# Altium PCB DE-100224.PcbDoc
Units mil, origin at the board's own origin, x right, y up, seen from the top; angles counter-clockwise.
Board outline 3346.46 x 2952.76 mil, 2 copper layers (Top Layer, Bottom Layer); 89 components, 54 nets, 214 pads, 11 vias.
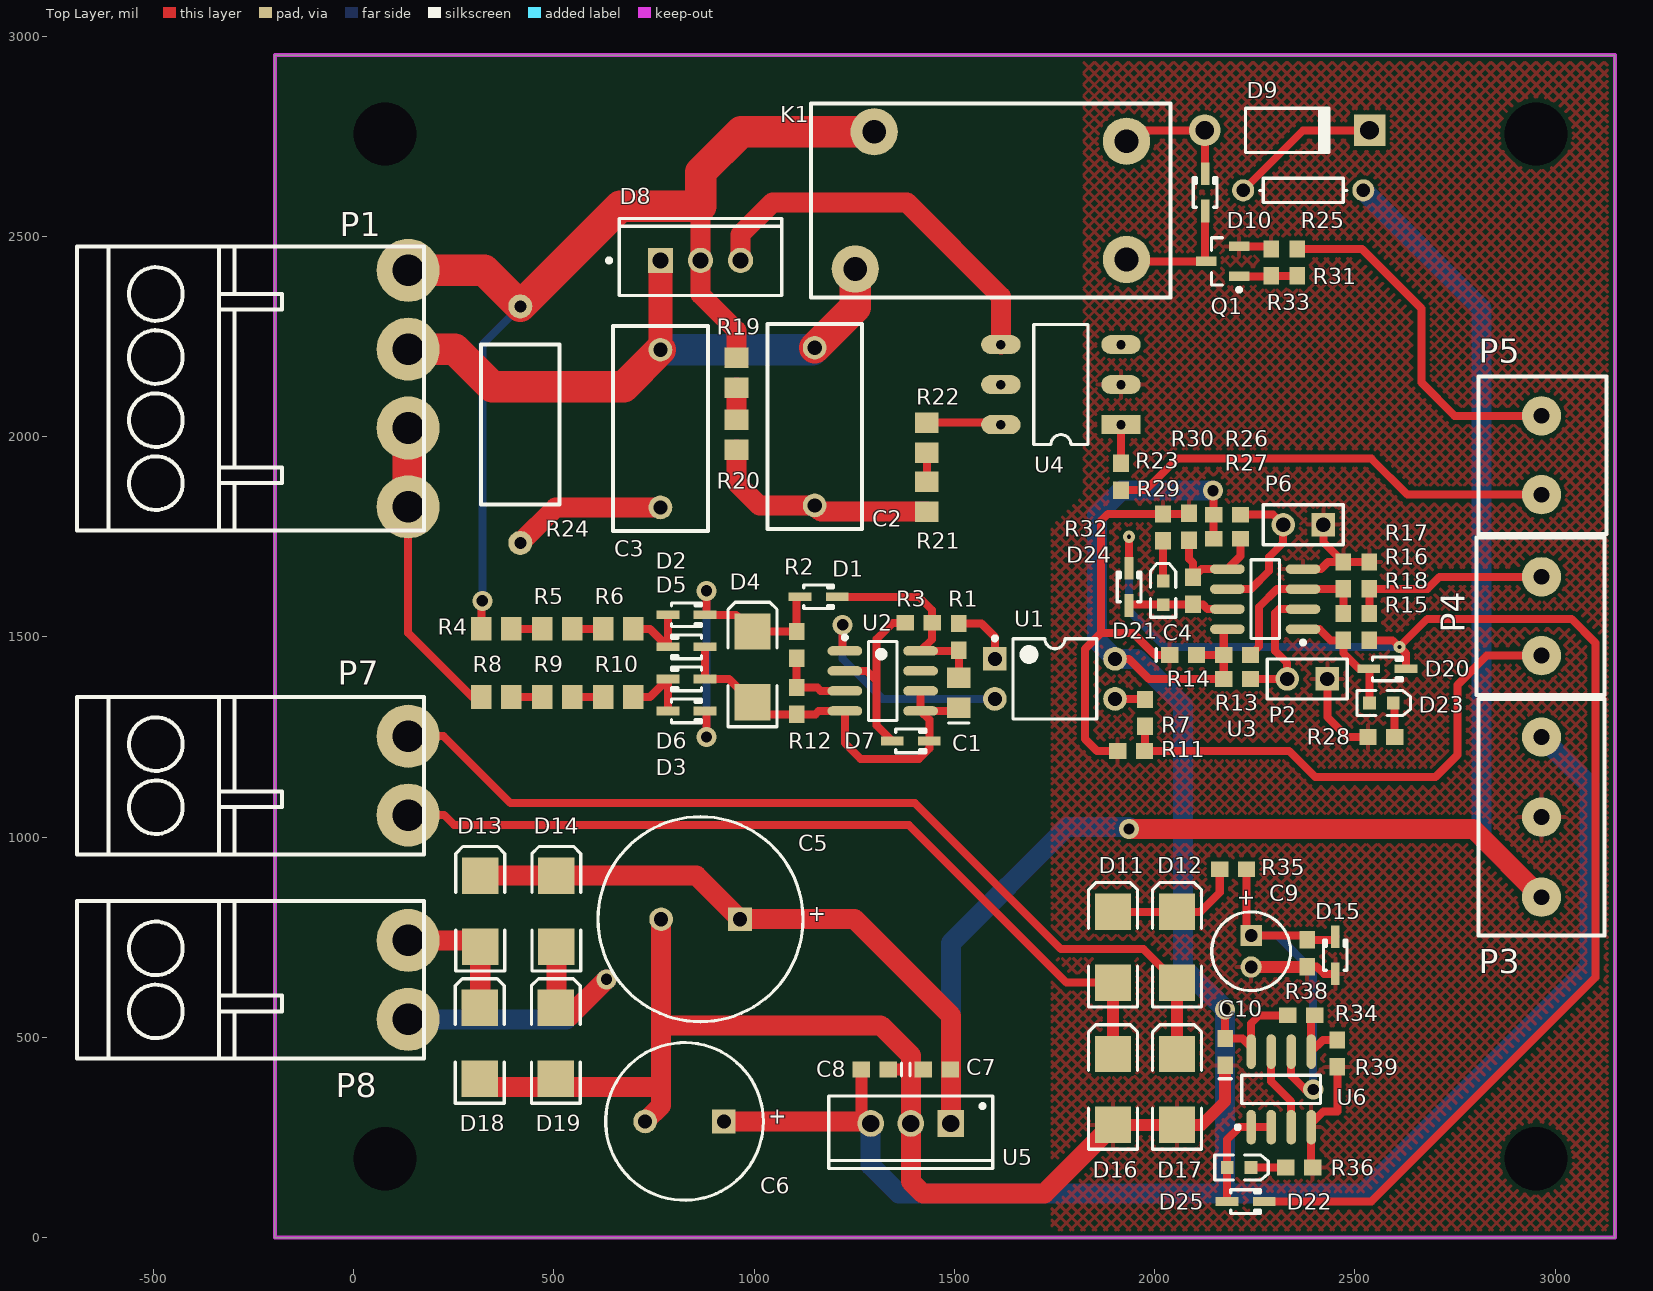
[diagram p0: Top Layer view]
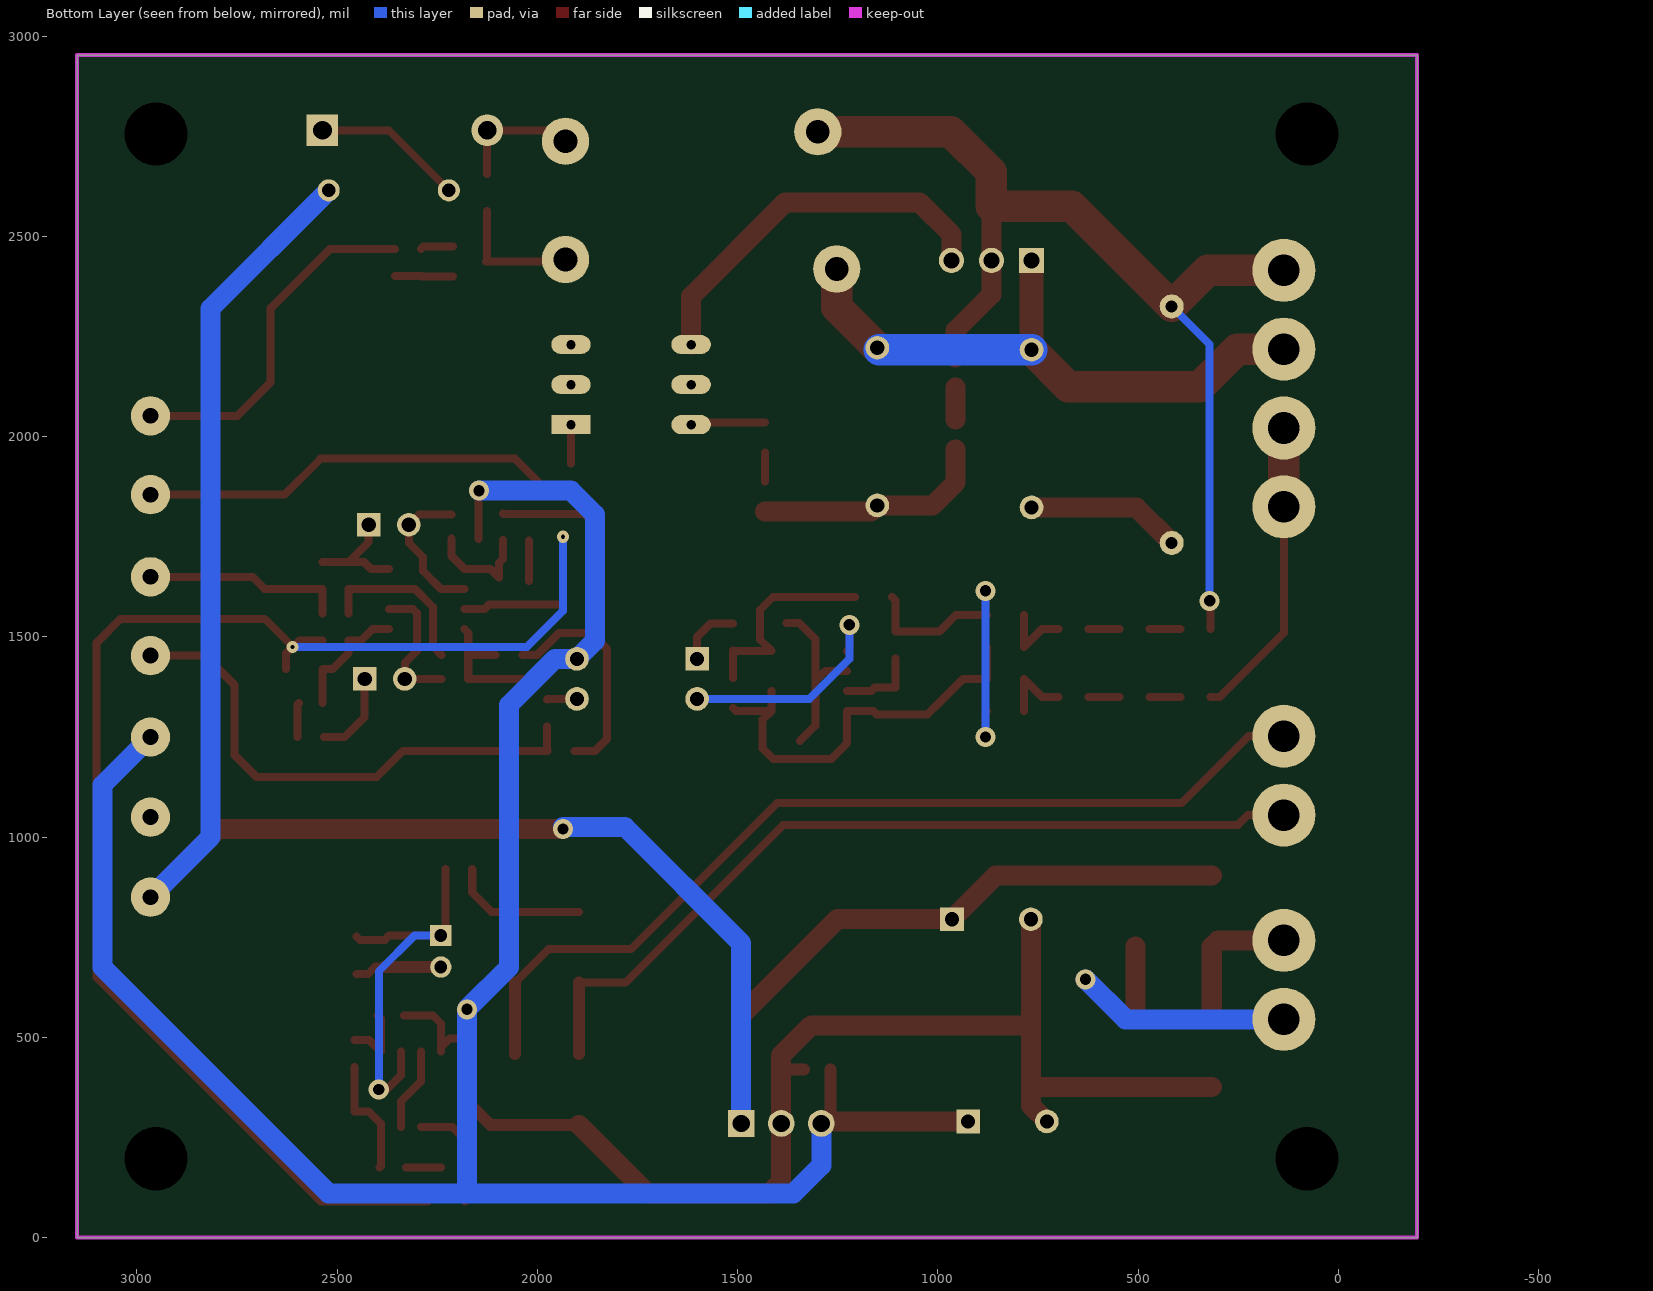
[diagram p1: Bottom Layer view, seen from below]

## Layer stack, top to bottom
Top Solder: solder mask 0.4, Solder Resist, Dk 3.5
Top Layer: signal copper 1.4
Dielectric 1: dielectric 12.6, FR-4, Dk 4.8
Bottom Layer: signal copper 1.4
Bottom Solder: solder mask 0.4, Solder Resist, Dk 3.5

## Board outline
-196.85,0 3149.61,0 3149.61,2952.76 -196.85,2952.76

## Design rules (kind name [scope] priority, off if disabled: settings)
Clearance [All] p1: gap=10 ignorepadtopadclearanceinfootprint=FALSE except(0: Arc-Hole Track-Hole SMDPad-Hole THPad-Hole Via-Hole Fill-Hole Poly-Hole Region-Hole Text-Hole)
Height [All] p1: minheight=0 maxheight=2000 prefheight=500
HoleSize [All] p1: absolutevalues=TRUE maxlimit=200 minlimit=1 maxpercent=80.000 minpercent=20.000
PolygonConnect [All] p1: connectstyle=Relief reliefconductorwidth=10 reliefentries=4 polygonreliefangle="90 Angle" airgapwidth=10
RoutingVias [All] p1: holewidth=28 width=50 viastyle="Through Hole" minholewidth=28 minwidth=50 maxholewidth=28 maxwidth=50
SolderMaskExpansion [All] p1: expansion=4
Width [All] p1: maxlimit=100 minlimit=10 preferedwidth=30
28 further rules are at their usual default settings.

## Components (designator, comment, footprint, x,y, rotation, side; value= is the part's Value field where it differs from the comment)
C1 "10uF" 0805 1511.3,1360 r90 top
C2 "47nF" "X2 CAP" 1151.3,2025 r270 top
C3 "47nF" "X2 CAP" 766.3,2020 r270 top
C4 "100nF" 0603 2071.3,1455 r0 top
C5 "4700uF" CAPPR5-13X25 866.3,795 r180 top
C6 "470uF" CAPPR5-10X16 826.3,290 r180 top
C7 "100nF" 0603 1456.3,420 r0 top
C8 "100nF" 0603 1301.3,420 r180 top
C9 "100uF" CAPPR2-5X11 2241.3,715 r270 top value=47uF
C10 "100nF" 0603 2176.3,463.46 r90 top
D1 "1N4148" SOD323 1161.3,1600 r0 top
D2 "1N4148" SOD323 831.3,1555 r0 top
D3 "1N4148" SOD323 831.3,1315 r0 top
D4 "ZD12V" SMB 996.3,1425 r90 top
D5 "1N4148" SOD323 831.3,1475 r180 top
D6 "1N4148" SOD323 831.3,1395 r180 top
D7 "1N4148" SOD323 1391.3,1240 r0 top
D8 "BTA16-600" ONSC-TO-220-3-221A-07 866.3,2440 r90 top
D9 "ZD8V2" DO-41 2331.3,2765 r0 top
D10 "1N4148" SOD323 2126.3,2610 r90 top
D11 "1N4001" SMB 1896.3,725 r90 top
D12 "1N4001" SMB 2056.3,725 r90 top
D13 "S3GB" SMB 316.3,815 r90 top
D14 "S3GB" SMB 506.3,815 r90 top
D15 "ZD3V3" SOD323 2451.3,705 r90 top
D16 "1N4001" SMB 1896.3,370 r90 top
D17 "1N4001" SMB 2056.3,370 r90 top
D18 "S3GB" SMB 315,485 r90 top
D19 "S3GB" SMB 505,485 r90 top
D20 "1N4148" SOD323 2581.3,1420 r0 top
D21 "1N4148" SOD323 1936.3,1625 r90 top
D22 "1N4148" SOD323 2227.56,90 r0 top
D23 "TRIAC_TEMP_ERROR" 1.6X0.8X0.8 2566.3,1335 r0 top
D24 "TRAFO_TEMP_ERROR" 1.6X0.8X0.8 2021.3,1610 r90 top
D25 "TRAFO_VOLTAGE_ERROR" 1.6X0.8X0.8 2211.3,175 r0 top
K1 "HF25F" HF25F 1591.3,2590 r180 top
P1 "KONEKTOR 4 PINA" "KONEKTOR 4 PINA" 136.3,2120 r0 top
P2 "NTC10K" HDR1X2 2431.3,1395 r180 top
P3 "" "TERMINAL BLOK 3" 2966.3,1050 r0 top
P4 "" "TERMINAL BLOK 2" 2966.3,1551.57 r180 top
P5 "" "TERMINAL BLOK 2" 2966.3,1953.43 r0 top
P6 "NTC10K" HDR1X2 2421.3,1780 r180 top
P7 "HEAT_TRAFO" "KONEKTOR 2 PINA" 136.3,1153.43 r0 top
P8 "PWR_TRAFO" "KONEKTOR 2 PINA" 136.3,643.43 r0 top
Q1 "MMBT2222A" SOT23_N 2169.96,2437.6 r180 top
R1 "1K" ERA-0603 1511.3,1500 r270 top
R2 "3K9" ERA-0603 1106.3,1480 r90 top
R3 "39K" ERA-0603 1411.3,1535 r0 top
R4 "18K" ERA-0805 356.3,1520 r0 top
R5 "18K" ERA-0805 508.8,1520 r0 top
R6 "18K" ERA-0805 661.3,1520 r0 top
R7 "1K2" ERA-0603 1976.3,1310 r90 top
R8 "18K" ERA-0805 356.3,1350 r0 top
R9 "18K" ERA-0805 508.8,1350 r0 top
R10 "18K" ERA-0805 661.3,1350 r0 top
R11 "2K2" ERA-0603 1941.3,1215 r0 top
R12 "39K" ERA-0603 1106.3,1340 r90 top
R13 "10K" ERA-0603 2206.3,1395 r180 top
R14 "10K" ERA-0603 2206.3,1455 r180 top
R15 "1K" ERA-0603 2536.3,1525 r270 top
R16 "2K2" ERA-0603 2536.3,1653.46 r270 top
R17 "NF" ERA-0603 2471.3,1653.46 r270 top
R18 "220K" ERA-0603 2471.3,1525 r90 top
R19 "220R" ERA-0805 956.3,2160 r270 top
R20 "220R" ERA-0805 956.3,2005 r270 top
R21 "220R" ERA-0805 1431.3,1850 r90 top
R22 "220R" ERA-0805 1431.3,1997.6 r90 top
R23 "180R" ERA-0603 1916.3,1900 r90 top
R24 "100R" 1W100R 416.3,2030 r90 top
R25 "Res1" AXIAL-0.3 2371.3,2615 r0 top value=47R
R26 "10K" ERA-0603 2181.3,1805 r180 top
R27 "10K" ERA-0603 2181.3,1745 r180 top
R28 "1K" ERA-0603 2566.3,1250 r0 top
R29 "1K" ERA-0603 2021.3,1773.46 r270 top
R30 "NF" ERA-0603 2086.3,1775 r270 top
R31 "1K" ERA-0603 2356.3,2435 r270 top
R32 "220K" ERA-0603 2096.3,1615 r90 top
R33 "100K" ERA-0603 2291.3,2435 r270 top
R34 "10K" ERA-0603 2366.3,555 r180 top
R35 "33K" ERA-0603 2196.3,920 r180 top
R36 "1K" ERA-0603 2361.3,175 r180 top
R38 "3K3" ERA-0603 2381.3,710 r90 top
R39 "NF" ERA-0603 2456.3,460 r90 top
U1 "PC817" DIP-4 1751.3,1395 r0 top
U2 "LM393MX" M08A_N 1321.3,1390 r0 top
U3 "LM358AD" SO8_N 2276.3,1594.19 r180 top
U4 "MOC3052" DIP6 1916.3,2030 r180 top
U5 "L78M05CV" TO220 1391.3,285 r180 top
U6 "LM358AD" SO8_N 2316.3,370 r90 top

## Footprints (in the part's own frame and the unit in brackets; to place one, negate y for a bottom-side part, rotate by r counter-clockwise, add the part's x,y. Pads: shape width x height; smd on the part's side, far side on the other; paste and mask are expansions set on the pad)
1.6X0.8X0.8 [mm] "SM LED; 2 Flat Leads"
  rect 0.8x0.8 smd: 1(-0.75,0) 2(0.75,0)
  silkscreen extent -1.55,-0.8 1.85,0.8
1W100R [mil] "1W 100R resistor"
  round 60 hole 30: 1(-295.28,0) 2(295.28,0)
  silkscreen extent -200,-98 200,98
0603 [mm] "Chip Capacitor; Body 1.6 x 0.8 mm (LxW typ)"
  rect 1.1x1 smd: 1(-0.85,0) 2(0.85,0)
  silkscreen extent -1.7,-0.4 -1.7,0.4
0805 [mm] "Chip Capacitor; Body 2.0 x 1.2 mm (LxW typ)"
  rect 1.3x1.5 smd: 1(-0.95,0) 2(0.95,0)
  silkscreen extent -1.9,-0.65 -1.9,0.65
AXIAL-0.3 [mm] "Axial Device, Thru-Hole; 2 Leads; 0.3 in Pin Spacing"
  round 1.4 hole 0.85: 1(-3.81,0) 2(3.81,0)
  silkscreen extent -2.77,-0.76 2.77,0.76
CAPPR2-5X11 [mm] "Capacitor, Electrolytic, Radial; Body 5 x 11 mm (Dia.xH typ); Pin Spacing 2 mm (typ)"
  rect 1.35x1.35 hole 0.8: 1(-1,0)
  round 1.35 hole 0.8: 2(1,0)
  silkscreen extent -2.5,-2.5 2.5,2.5
CAPPR5-10X16 [mm] "Capacitor, Electrolytic, Radial; Body 10 x 16 mm (Dia.xH typ); Pin Spacing 5 mm (typ)"
  rect 1.5x1.5 hole 0.9: 1(-2.5,0)
  round 1.5 hole 0.9: 2(2.5,0)
  silkscreen extent -5,-5 5,5
CAPPR5-13X25 [mm] "Capacitor, Electrolytic, Radial; Body 13 x 25 mm (Dia.xH typ); Pin Spacing 5 mm (typ)"
  rect 1.5x1.5 hole 0.9: 1(-2.5,0)
  round 1.5 hole 0.9: 2(2.5,0)
  silkscreen extent -6.5,-6.5 6.5,6.5
DIP6 [mm]
  rect 2.5x1.2 hole 0.6: 1(0,0)
  oval 2.5x1.2 hole 0.6: 2(0,-2.54) 3(0,-5.08) 4(7.62,-5.08) 5(7.62,-2.54) 6(7.62,0)
  silkscreen extent 2.08,-6.35 5.54,1.27, body extent 0.63,-6.48 6.99,1.27, height 1
DIP-4 [mm] "DIP; 4 Leads; Row Spacing 7.62 mm; Pitch 2.54 mm"
  rect 1.5x1.5 hole 0.9: 1(-3.81,1.27)
  round 1.5 hole 0.9: 2(-3.81,-1.27) 3(3.81,-1.27) 4(3.81,1.27)
  silkscreen extent -3.93,-2.55 2.65,2.69, body extent -3.15,-2.5 3.15,2.5, height 5.6
DO-41 [mm] "Diode, Axial; Body 5.2 x 2.7 mm (LxDia. max), Lead Dia. 0.86 mm (max)"
  round 2 hole 1.2: 1(-5.23,0)
  rect 2x2 hole 1.2: 2(5.23,0)
  silkscreen extent -2.65,-1.4 2.75,1.4
ERA-0603 [mm] "Chip Resistor; Body 1.6 x 0.8 mm (LxW typ)"
  rect 1.1x1 smd: 1(-0.85,0) 2(0.85,0)
ERA-0805 [mm] "Chip Resistor; Body 2 x 1.3 mm (LxW typ)"
  rect 1.3x1.5 smd: 1(-0.95,0) 2(0.95,0)
HDR1X2 [mm] "Connector; Header; 2 Position"
  rect 1.5x1.5 hole 0.9: 1(0,0)
  round 1.5 hole 0.9: 2(2.54,0)
  silkscreen extent -1.27,-1.27 3.81,1.27
HF25F [mm] "PCB relay 20A/250VAC 16A/30VDC"
  round 3 hole 1.5: 1(-8.6,3.75) 2(-8.6,-3.75) 3(8.6,4.35) 4(7.4,-4.35)
  silkscreen extent -11.4,-6.15 11.4,6.15, body extent -11.43,-6.1 11.43,6.1, height 25
"KONEKTOR 2 PINA" [mm] "Razdvojivi konektor 2 pina"
  round 4 hole 2: 1(0,2.5) 2(0,-2.5)
  silkscreen extent -21,-5 1,5, body extent -20.95,-5.08 1.02,5.08, height 10
"KONEKTOR 4 PINA" [mm] "Razdvojivi konektor 4 pina"
  round 4 hole 2: 1(0,7.5) 2(0,2.5) 3(0,-2.5) 4(0,-7.5)
  silkscreen extent -21,-9 1,9, body extent -20.95,-9.02 1.02,9.14, height 10
M08A_N [mm] "SOIC, 8-Leads, Body 4.9x3.9mm, Pitch 1.27mm, IPC Medium Density"
  oval 2.2x0.6 smd: 1(-2.4,1.905) 2(-2.4,0.635) 3(-2.4,-0.635) 4(-2.4,-1.905) 5(2.4,-1.905) 6(2.4,-0.635) 7(2.4,0.635) 8(2.4,1.905)
  silkscreen extent -2.52,-2.5 0.9,2.88, body extent -2,-2.5 2,2.5, height 1.75
ONSC-TO-220-3-221A-07 [mm] "FM, 3-Leads, Body 10.3x4.85mm, Pitch 2.54mm"
  rect 1.6x1.6 hole 1: 1(0,2.54)
  round 1.6 hole 1: 2(0,0) 3(0,-2.54)
  silkscreen extent -2.23,-5.15 2.67,5.92, body extent -2.21,-5.15 2.64,5.15, height 19.68
SMB [mm] "DO-214-AA/SMB; 2 C-Bend Leads; Body 5.3 x 3.6 mm, inc. leads (LxW)"
  rect 2.3x2.3 smd: 1(-2.25,0) 2(2.25,0)
  silkscreen extent -3.8,-1.55 4.1,1.55
SO8_N [mm] "SOIC, 8-Leads, Body 4.9x3.9mm, Pitch 1.27mm, IPC Medium Density"
  oval 2.2x0.6 smd: 1(-2.4,1.905) 2(-2.4,0.635) 3(-2.4,-0.635) 4(-2.4,-1.905) 5(2.4,-1.905) 6(2.4,-0.635) 7(2.4,0.635) 8(2.4,1.905)
  silkscreen extent -2.53,-2.5 0.9,2.88, body extent -1.95,-2.45 1.95,2.45, height 1.75
SOD323 [mm] "SOD-323/SC-76; 2 Leads; Body 1.7 x 1.3 mm, (LxW)"
  rect 1.45x0.55 smd: 1(1.175,0) 2(-1.175,0)
  silkscreen extent -0.95,-0.75 0.95,0.75
SOT23_N [mm] "SOT23, 3-Leads, Body 2.9x1.3mm, Pitch 0.95mm, Lead Span 2.3mm, IPC Medium Density"
  rect 1.3x0.6 smd: 1(-1.05,0.95) 2(-1.05,-0.95) 3(1.05,0)
  silkscreen extent -1.18,-1.5 0.7,1.92, body extent -0.7,-1.5 0.7,1.5, height 1.1
"TERMINAL BLOK 2" [mm] "Terminal blok 3,5mm"
  round 2.5 hole 1: 1(0,-2.5) 2(0,2.5)
  silkscreen extent -4,-5 4.13,5
"TERMINAL BLOK 3" [mm] "Terminal blok konektor 3 pina"
  round 2.5 hole 1: 1(0,5.08) 2(0,0) 3(0,-5.08)
  silkscreen extent -4,-7.5 4,7.5
TO220 [mm] "TO, Thru-Hole, Vertical, Heatsink Mounted; 3 In-Line Leads; Pitch 2.54 mm"
  rect 1.7x1.7 hole 1.1: 1(-2.54,0)
  round 1.7 hole 1.1: 2(0,0) 3(2.54,0)
  silkscreen extent -5.2,-1.75 5.2,2.85, body extent -5.25,-1.8 5.25,2.9, height 19.7
"X2 CAP" [mm] "X2 275VAC CAPACITOR"
  round 1.5 hole 0.9: 1(-5,0) 2(5,0)
  silkscreen extent -6.5,-3 6.5,3, body extent -6.35,-3.05 6.35,3.05, height 10

## Part data
C1: library part C0805, "Ceramic Chip Capacitor - Standard", PackageDocument=Mar-2001, Code_IPC=2012[0805], Code_JEITA=0805, ComponentLink1Description="Manufacturer Link", ComponentLink1URL=http://www.kemet.com/, ComponentLink2Description=Datasheet, ComponentLink2URL=http://www.kemet.com/kemet/web/homepage/kechome.nsf/vapubfilesname/F3102TA.pdf/$file/F3102TA.pdf, DatasheetDocument=Mar-2001, LatestRevisionDate=19-Mar-2004, LatestRevisionNote="Silkscreen size reduced.", Note="Footprint corresponds to dimensions for bulk cassette packaging. This case size has tightened tolerances.", PackageReference=0805, Published=17-Jul-2002, Publisher="Altium Limited"
C2 C3: library part "CAP X2", "X2 275VAC capaitor"
C4 C7 C8 C10: library part C0603, "Ceramic Chip Capacitor - Standard", PackageDocument=Mar-2001, Code_IPC="1608 [0603]", Code_JEITA=0603, ComponentLink1Description="Manufacturer Link", ComponentLink1URL=http://www.kemet.com/, ComponentLink2Description=Datasheet, ComponentLink2URL=http://www.kemet.com/kemet/web/homepage/kechome.nsf/vapubfilesname/F3102TA.pdf/$file/F3102TA.pdf, DatasheetDocument=Mar-2001, LatestRevisionDate=19-Mar-2004, LatestRevisionNote="Silkscreen size reduced.", Note="Footprint corresponds to dimensions for bulk cassette packaging. This case size has tightened tolerances.", PackageReference=0603, Published=17-Jul-2002, Publisher="Altium Limited"
C5: library part EKA00GG447C00, "Aluminum Electrolytic Capacitor, Radial Style with Long Leads: 4700uF, 10V", ComponentLink1Description="Manufacturer Link", ComponentLink1URL=http://www.vishay.com/, ComponentLink2Description=Datasheet, ComponentLink2URL=http://www.vishay.com/docs/25014/eka.pdf, DatasheetDocument=20-Feb-2001, DrillSize="Nominal, Rounded To The Nearest 0.1mm", Note="Refer to Manufacturer's Data Sheets for other lead formations", PackageReference=CAPPR5-13X25, Published=19-Mar-2004, Publisher="Altium Limited"
C6: library part EKA00DD347F00, "Aluminum Electrolytic Capacitor, Radial Style with Long Leads: 470uF, 35V", ComponentLink1Description="Manufacturer Link", ComponentLink1URL=http://www.vishay.com/, ComponentLink2Description=Datasheet, ComponentLink2URL=http://www.vishay.com/docs/25014/eka.pdf, DatasheetDocument=20-Feb-2001, DrillSize="Nominal, Rounded To The Nearest 0.1mm", Note="Refer to Manufacturer's Data Sheets for other lead formations", PackageReference=CAPPR5-10X16, Published=19-Mar-2004, Publisher="Altium Limited"
C9: library part EKA00AA247F00, "Aluminum Electrolytic Capacitor, Radial Style with Long Leads: 47uF, 35V", ComponentLink1Description="Manufacturer Link", ComponentLink1URL=http://www.vishay.com/, ComponentLink2Description=Datasheet, ComponentLink2URL=http://www.vishay.com/docs/25014/eka.pdf, DatasheetDocument=20-Feb-2001, DrillSize="Nominal, Rounded To The Nearest 0.1mm", Note="Refer to Manufacturer's Data Sheets for other lead formations", PackageReference=CAPPR2-5X11, Published=19-Mar-2004, Publisher="Altium Limited"
D1 D2 D3 D5 D6 D7 D10 D15 D20 D21 D22: library part 1PS76SB10, "Schottky Barrier Diode", ComponentLink1Description="Manufacturer Link", ComponentLink1URL=http://www.semiconductors.philips.com/, ComponentLink2Description=Datasheet, ComponentLink2URL=http://www.semiconductors.philips.com/acrobat/datasheets/1PS76SB10_2.pdf, DatasheetVersion=14-Oct-1996, LatestRevisionDate=19-Mar-2004, LatestRevisionNote="Silkscreen size reduced.", PackageDescription="SOD-323/SC-76; 2 Leads; Body 1.7 x 1.3 mm, (LxW)", PackageReference=SOD323, PackageVersion=May-1999, Published=17-Sep-2003, Publisher="Altium Limited"
D4: library part 10BQ100, "Schottky Rectifier", ComponentLink1Description="Manufacturer Link", ComponentLink1URL=http://www.irf.com/, ComponentLink2Description=Datasheet, ComponentLink2URL=http://www.irf.com/product-info/datasheets/data/10bq100.pdf, DatasheetVersion=PD-2.437A, LatestRevisionDate=17-Jul-2002, LatestRevisionNote="Re-released for DXP Platform.", PackageDescription="DO-214-AA/SMB; 2 C-Bend Leads; Body 5.3 x 3.6 mm, inc. leads (LxW)", PackageReference=SMB, Published=8-Jun-2000, Publisher="Altium Limited"
D8: library part BTA08-600BW3G, "Triacs, Silicon Bidirectional Thyristor, 3-Pin TO-220, Pb-Free, Tube", Manufacturer="On Semiconductor", Supplier Part Number 1=BTA08-600BW3G-ND, ComponentLink1Description="Manufacturer URL", ComponentLink1URL=http://www.onsemi.com/, ComponentLink2Description=Datasheet, ComponentLink2URL=http://www.onsemi.com/pub_link/Collateral/BTA08-600BW3-D.PDF, ComponentLink3Description="Package Specification", ComponentLink3URL=http://www.onsemi.com/pub_link/Collateral/221A-07.PDF, DatasheetVersion="Rev. 1", IGT Max (mA)=50, IT(RMS) Max (A)=8, ITSM Max (A)=90, Mounting Technology="Through Hole", PackageDescription="3-Pin Flange Mount, Vertical Straight Lead, Body 9.97 x 4.445 mm, Pitch 2.54 mm", PackageReference=TO-220-3-221A-07, PackageVersion="Rev. O, 07/2008", Packing=Tube, PartNumber=BTA08-600BW3G, RoHS=Pb-Free, Supplier 1=Digi-Key, Supplier 2=Newark, Supplier 3=Mouser, Supplier Part Number 2=13P2072, Supplier Part Number 3=863-BTA08-600BW3G
D9: library part 1N4003, "1.0 Ampere General Purpose Rectifier", PackageDocument=Aug-1999, Code_JEDEC=DO-204-AL, ComponentLink1Description="Manufacturer Link", ComponentLink1URL=http://www.fairchildsemi.com/, ComponentLink2Description="Pinout Specification", ComponentLink2URL=http://www.fairchildsemi.com/ds/1N%2F1N4001.pdf, DatasheetDocument=1998, LatestRevisionDate=17-Jul-2002, LatestRevisionNote="Re-released for DXP Platform.", PackageReference=DO-41, Published=8-Jun-2000, Publisher="Altium Limited"
D11 D12 D13 D14 D16 D17 D18 D19: library part "D Schottky", "Schottky Diode", Code_JEDEC=DO-214-AA, LatestRevisionDate=17-Jul-2002, LatestRevisionNote="Re-released for DXP Platform.", PackageDescription="DO-214-AA/SMB; 2 C-Bend Leads; Body 5.3 x 3.6 mm, inc. leads (LxW)", PackageReference=SMB, Published=8-Jun-2000, Publisher="Altium Limited"
D23 D24 D25: library part HSMB-C190, "Blue Surface Mount Chip LED, Blue", LED_Colour=Blue, ComponentLink1Description="Manufacturer Link", ComponentLink1URL=http://www.avagotech.com/, ComponentLink2Description=Datasheet, ComponentLink2URL=http://cp.literature.agilent.com/litweb/pdf/5988-5211EN.pdf, DatasheetVersion=26-Feb-2002, LuminousIntensity="1.6mcd (Minimum).", PackageDescription="SM LED; 2 Flat Leads", PackageReference=1.6X0.8X0.8, PackageVersion=Mar-2002, PCB_Layout="Complies with manufacturer's recommendation.", Published=11-Dec-2002, Publisher="Altium Limited"
K1: "PCB relay 250VAC/20A 30VDC/16A"
P1: "Razdvojivi konektor 4 pina"
P2 P6: library part "Header 2", "Header, 2-Pin", LatestRevisionDate=17-Jul-2002, LatestRevisionNote="Re-released for DXP Platform.", Publisher="Altium Limited"
P3: library part "TERMINAL BLOK 3", "3 pinski terminal blok konektor"
P4 P5: library part "TERMINAL BLOK 2", "Terminal blok konektor 3,5 mm"
P7 P8: library part "KONEKTOR 2 PINA", "Razdvojivi konetor 2 pina"
Q1: library part BC817, "NPN General-purpose Transistor", ComponentLink1Description="Manufacturer Link", ComponentLink1URL=http://www.semiconductors.philips.com/, ComponentLink2Description=Datasheet, ComponentLink2URL=http://www.semiconductors.philips.com/acrobat/datasheets/BC817_BC817W_BC337_5.pdf, DatasheetVersion=Jun-1999, LatestRevisionDate=12-Dec-2006, LatestRevisionNote="IPC-7351 Footprint Added.", PackageDescription="3-Pin SOT-23 Package 0.95 mm Pitch, 2.3 mm Lead Span", PackageReference=SOT23, PackageVersion=May-1999, Published=17-Sep-2003, Publisher="Altium Limited"
R1 R2 R3 R7 R11 R12 R13 R14 R15 R16 R17 R18 R23 R26 R27 R28 R29 R30 R31 R32 R33 R34 R35 R36 R38 R39: library part ERAV, "Metal Film Thermosensitive Chip Resistor, 0.56 Ohm to 10k Ohm Range, 5% Tolerance, 0603 Size, 0.063 W", PackageDocument=Mar-2003, Code_IPC="1608 [0603]", ComponentLink1Description="Manufacturer Link", ComponentLink1URL=http://www.panasonic.com/industrial/components/resistive_products.htm, ComponentLink2Description=Datasheet, ComponentLink2URL=http://www.panasonic.com/industrial/components/pdf/AOF0000CE1.pdf, LatestRevisionDate=19-Mar-2004, LatestRevisionNote="Silkscreen size reduced.", Note="If flow soldering, adjust pad width of PCB Footprint to 0.7 - 0.8 times the width of the resistor.", PackageReference=ERA-0603, Published=17-Dec-2003, Publisher="Altium Limited"
R4 R5 R6 R8 R9 R10 R19 R20 R21 R22: library part ERAS, "Metal Film Thermosensitive Chip Resistor, 0.56 Ohm to 10k Ohm Range, 5% Tolerance, 0805 Size, 0.1 W", PackageDocument=Mar-2003, Code_IPC="2012 [0805]", ComponentLink1Description="Manufacturer Link", ComponentLink1URL=http://www.panasonic.com/industrial/components/resistive_products.htm, ComponentLink2Description=Datasheet, ComponentLink2URL=http://www.panasonic.com/industrial/components/pdf/AOF0000CE1.pdf, LatestRevisionDate=19-Mar-2004, LatestRevisionNote="Silkscreen size reduced.", Note="If flow soldering, adjust pad width of PCB Footprint to 0.7 - 0.8 times the width of the resistor.", PackageReference=ERA-0805, Published=17-Dec-2003, Publisher="Altium Limited"
R24: library part 1W100R, "Carbon F 1W resistor", ComponentLink1Description="Manufacturer Link", ComponentLink1URL=http://www.panasonic.com/industrial/components/resistive_products.htm, ComponentLink2Description=Datasheet, ComponentLink2URL=http://www.panasonic.com/industrial/components/pdf/AOA0000CE12.pdf, PackageReference=RD6.35x2.3, Published=17-Dec-2003, Publisher="Altium Limited"
R25: "Resistor", LatestRevisionDate=17-Jul-2002, LatestRevisionNote="Re-released for DXP Platform.", PackageDescription="Axial Device, Thru-Hole; 2 Leads; 0.3 in Pin Spacing", PackageReference=AXIAL-0.3, Published=8-Jun-2000, Publisher="Altium Limited"
U1: "4-Pin Phototransistor Optocoupler", DatasheetVersion=Nov-2003, LatestRevisionDate=04-Mar-2005, LatestRevisionNote="Sch pins 3 & 4 Swapped.", PackageReference=DIP-4, Published=24-Mar-1999, Publisher="Altium Limited"
U2: "Low Power Low Offset Voltage Dual Comparator, 8-pin Narrow SOIC", Manufacturer="National Semiconductor", PackageTopMarking=NSZXTT*LM*393M, PowerWise=N, Code_IPC=SOIC127P600-8, Code_JEDEC=MS-012-AA, ComponentLink1Description="Manufacturer URL", ComponentLink1URL=http://www.national.com/, ComponentLink2Description="LM393 Datasheet", ComponentLink2URL=http://www.national.com/ds/LM/LM393.pdf, ComponentLink3Description="LM393 Web Page", ComponentLink3URL=http://www.national.com/pf/LM/LM393.html, ComponentLink4Description="M08A Package Page", ComponentLink4URL=http://www.national.com/packaging/folders/m08a.html, CompType=Comparator, DatasheetVersion=Aug-2002, High-Reliability=Y, PackageDescription="SOIC Narrow, 4.9 x 3.9 x 1.45mm, 8 Lead, 1.27mm Pitch", PackageReference=M08A, PackageVersion="revM, May-2009", PartNumber=LM393MX, PinCount=8, RoHS=N
U3 U6: "Low-Power Dual Operational Amplifier", Code_IPC=SOIC127P600-8, Code_JEDEC=MS-012-AA, ComponentLink1Description="Manufacturer Link", ComponentLink1URL=http://www.st.com/, ComponentLink2Description=Datasheet, ComponentLink2URL=http://www.st.com/stonline/products/literature/ds/2163/lm358.pdf, DatasheetVersion=Jun-1998, LatestRevisionDate=13-Apr-2006, LatestRevisionNote="IPC-7351 Footprint Added.", PackageDescription="8-Pin Small Outline Integrated Circuit 1.27 mm Pitch", PackageReference=SO8, PackageVersion=Dec-2002, Published=24-Aug-2001, Publisher="Altium Limited"
U4: library part MOC3081, "Zero-Cross Optoisolator Triac Driver"
U5: "Positive Voltage Regulator, 5V, 3-Pin TO-220", ComponentLink1Description="Manufacturer URL", ComponentLink1URL=http://www.st.com, ComponentLink2Description=Datasheet, ComponentLink2URL=http://www.st.com/internet/com/TECHNICAL_RESOURCES/TECHNICAL_LITERATURE/DATASHEET/CD00000447.pdf, ComponentLink3Description="Package Specification", ComponentLink3URL=http://www.st.com/internet/com/TECHNICAL_RESOURCES/TECHNICAL_LITERATURE/PACKAGE_INFORMATION/CD00004649.pdf, DatasheetVersion=Nov-2010, PackageDescription="TO, Thru-Hole, Vertical, Heatsink Mounted; 3 In-Line Leads; Pitch 2.54 mm", PackageReference=TO220, PackageVersion=ver3.0, PartNumber=L78M05CV

## Free pads (board coordinates)
  round 60 hole 157.48: 5(78.74,196.85) 5(78.74,2755.91) 5(2952.76,196.85) 5(2952.76,2755.91)

## Via types
v1: diameter 50, hole 28, Top Layer to Bottom Layer, 9 vias
v2: diameter 30, hole 10, Top Layer to Bottom Layer, 2 vias

## Nets (pads, with @x,y where several pads share a name; then routed paths per layer and width w, separated by ;. In a path a pad name is that pad's centre, name@x,y a point inside that pad or via, vN(x,y) a via of type N, cw(c..) or ccw(c..) an arc to the next point about the centre after c; other vN are vias at no path point)
+5V: C4.2 C6.1 C8.2 C10.2 P3.1 R13.2 R14.2 R26.2 R27.2 R34.2 U1.4 U3.8 U5.3 U6.8 | length 6387.9
  Top Layer w20: U1.4 1936.3,1445 1986.3,1395 R13.2 R14.2 ; C4.2 R14.2 ; v1(2146.3,1865) 2147.83,1863.46 R26.2 R27.2 ; v1(2176.3,570) C10.2 2219.37,496.93 U6.8@2241.3,475 ; U3.8 2172.83,1510.21 R14.2 ; U6.8 U6.8@2241.3,475 ; R34.2 2261.3,555 2241.3,535 U6.8@2241.3,475
  Top Layer w30: C8.2 1267.83,308.46 U5.3@1286.3,290
  Top Layer w50: C6.1 U5.3@1286.3,290
  Bottom Layer w50: U5.3 1291.3,180 1361.3,110 2176.3,110 ; v1(2146.3,1865) 1916.3,1865 1856.3,1805 1856.3,1490 U1.4 1956.3,1445 2071.3,1330 2071.3,675 v1(2176.3,570) 2176.3,110 ; P3.1 3086.3,1130 3086.3,675 2521.3,110 2176.3,110
+24V: C5.1 C7.2 D13.2 D14.2 P3.3 R25.2 U5.1 | length 5654.3
  Top Layer w50: D13.2 D14.2 856.14,903.58 C5.1 1251.3,795 1491.3,555 U5.1 ; v1(1936.3,1020) 2796.3,1020 P3.3
  Bottom Layer w50: U5.1 1491.3,735 1781.3,1025 v1@1936.3,1025 ; R25.2 2816.3,2320 2816.3,1000 P3.3
AC_L: D8.2 K1.4 P1.1 R4.1 R19.1 R24.2 | length 2691.8
  Top Layer w20: R4.1 318.9,1587.6 v1(321.3,1590)
  Top Layer w50: 866.3,2575 D8.2 866.3,2355 956.3,2265 R19.1
  Top Layer w78.74: P1.1 326.3,2415.28 R24.2 666.02,2575 866.3,2575 866.3,2660 967.56,2761.26 K1.4
  Bottom Layer w20: v1(321.3,1590) 321.3,2230.28 R24.2
AC_N: P1.3 P1.4 R8.1 | length 760.4
  Top Layer w20: P1.4 136.3,1510 296.3,1350 R8.1
  Top Layer w78.74: P1.4 P1.3
AC_O: C2.1 C3.1 D8.1 K1.3 P1.2 | length 1555.9
  Top Layer w59.06: C3.1 D8.1
  Top Layer w78.74: P1.2 252.87,2218.43 346.3,2125 674.45,2125 C3.1 ; C2.1 1252.72,2323.27 K1.3
  Bottom Layer w50: C2.1@1146.3,2216.85 C2.1
  Bottom Layer w78.74: C3.1 C2.1@1146.3,2216.85
COMMON_ERROR: P4.1 R15.1 R16.2 | length 504
  Top Layer w20: R15.1 R16.2 2681.3,1620 2711.3,1650 P4.1
GND: C4.1 C5.2 C6.2 C7.1 C8.1 C9.2 C10.1 D15.2 D16.1 D17.1 D18.1 D19.1 P2.1 P3.2 P6.1 Q1.2 R11.1 R16.1 R17.1 R28.1 R29.1 R30.1 R33.1 R36.1 R38.1 R39.1 U3.4 U4.2 U5.2 U6.4 | length 5165.6
  Top Layer w20: R11.1 1856.3,1215 1826.3,1245 1826.3,1470 1866.3,1510 ; C4.1 2001.3,1455 1946.3,1510 1866.3,1510 ; R30.1 2084.76,1806.93 R29.1 1883.23,1806.93 1866.3,1790 1866.3,1510 ; Q1.2 2284.76,2475 R33.1 ; U3.4 2415.49,1669.19 2433.23,1686.93 R17.1 ; R38.1 2404.76,676.54 2422.56,658.74 D15.2 ; R36.1 2391.3,178.46 U6.4 2391.3,285 2421.3,315 2456.3,315 R39.1 ; P6.1 2421.3,1736.93 R17.1 ; P2.1 2431.3,1300 2481.3,1250 R28.1 ; R16.1 R17.1
  Top Layer w30: C8.1 1391.3,420 ; D16.1 D17.1 2117.72,281.42 2176.3,340 C10.1 ; C9.2 2380.39,675.63 R38.1
  Top Layer w50: D18.1@316.3,376.42 764.29,376.42 767.87,380 ; C6.2 767.87,330 767.87,380 ; C5.2 767.87,530 ; D16.1 1724.88,110 1421.3,110 1391.3,140 U5.2 1391.3,420 1391.3,455 1316.3,530 767.87,530 ; 767.87,380 767.87,530
NetC1_1: C1.1 D4.1 D5.2 D6.2 D7.1 R12.1 U2.4 U2.5 U2.6 | length 1039.3
  Top Layer w20: D5.2 D6.2 937.72,1395 D4.1 1026.18,1306.54 R12.1 1152.83,1306.54 1161.3,1315 U2.4 1226.81,1234.49 1266.3,1195 1411.3,1195 1437.56,1221.26 D7.1 1437.56,1293.23 U2.5 ; U2.6 U2.5 ; C1.1 1503.7,1315 U2.5
NetC1_2: C1.2 D1.1 R1.2 R3.2 U2.8 | length 529.9
  Top Layer w20: D1.1 1411.3,1600 1444.76,1566.54 R3.2 1444.76,1493.98 U2.8 1509.76,1465 R1.2 C1.2
NetC2_2: C2.2 R20.2 R21.1 | length 587.6
  Top Layer w50: R20.2 956.3,1885 1013.15,1828.15 C2.2 1166.85,1812.6 R21.1
NetC3_2: C3.2 R24.1 | length 386.6
  Top Layer w50: R24.1 504.72,1823.15 C3.2
NetC9_1: C9.1 D15.1 R35.1 R38.2 U6.6 | length 1004.2
  Top Layer w20: R35.1 2229.76,765.91 C9.1 2370.39,754.37 R38.2 2443.5,743.46 D15.1 ; U6.6 2341.3,405 2376.3,370 v1(2396.3,370)
  Bottom Layer w20: C9.1 2306.93,754.37 2396.3,665 v1(2396.3,370)
NetD1_2: D1.2 D2.1 D3.1 D4.2 R2.2 | length 843.3
  Top Layer w20: v1@876.3,1262.48 v1@881.3,1257.48 ; D3.1 881.3,1311.26 v1@881.3,1257.48 ; v1(881.3,1250) v1@881.3,1257.48 ; v1(881.3,1615) 881.3,1558.74 D2.1 954.88,1555 D4.2 1106.18,1513.58 R2.2 1106.3,1591.26 D1.2
  Bottom Layer w20: v1@876.3,1610 v1(881.3,1615) v1(881.3,1250)
NetD2_2: D2.2 D5.1 R6.2 | length 185
  Top Layer w20: R6.2 740.04,1520 D5.1 D2.2
NetD3_2: D3.2 D6.1 R10.2 | length 185
  Top Layer w20: R10.2 740.04,1350 D6.1 D3.2
NetD7_2: D7.2 R3.1 U2.2 | length 449
  Top Layer w20: U2.2 1281.3,1415 1306.3,1390 ; D7.2 1306.3,1278.74 1306.3,1390 ; R3.1 1346.3,1535 1306.3,1495 1306.3,1390
NetD8_3: D8.3 U4.4 | length 965.5
  Top Layer w50: D8.3 966.3,2505 1046.3,2585 1381.3,2585 1616.3,2350 U4.4
NetD9_1: D9.1 D10.1 K1.2 | length 316
  Top Layer w20: K1.2 1957.24,2765 D9.1 2126.3,2764.09 D10.1
NetD9_2: D9.2 R25.1 | length 378
  Top Layer w20: R25.1 2371.3,2765 D9.2
NetD10_2: D10.2 K1.1 Q1.3 | length 327.8
  Top Layer w20: K1.1 1934.65,2437.6 Q1.3 2126.3,2439.92 D10.2
NetD11_1: D11.1 D16.2 P7.2 | length 2111.2
  Top Layer w20: P7.2 226.3,1055 251.3,1030 1386.3,1030 1779.88,636.42 D11.1
  Top Layer w30: D16.2 D11.1
NetD11_2: D11.2 D12.2 R35.2 | length 344.9
  Top Layer w20: D11.2 D12.2 2114.88,813.58 2162.83,861.54 R35.2
NetD12_1: D12.1 D17.2 P7.1 | length 2364.3
  Top Layer w20: P7.1@128.17,1259.98 P7.1 224.45,1251.85 391.3,1085 1401.3,1085 1766.3,720 1972.72,720 D12.1
  Top Layer w30: D17.2 D12.1
NetD13_1: D13.1 D18.2 P8.1 | length 359.2
  Top Layer w50: P8.1 300.86,741.85 D13.1 D18.2@316.3,553.58
NetD14_1: D14.1 D19.2 P8.2 | length 872.1
  Top Layer w50: D14.1 506.3,553.58 539.88,553.58 v1(631.3,645)
  Bottom Layer w50: P8.2 531.3,545 v1(631.3,645)
NetD20_1: D20.1 D21.1 D22.1 R15.2 | length 3557.8
  Top Layer w20: D21.1 v2(1936.3,1750) ; D22.1 2541.3,90 3101.3,650 3101.3,1485 3041.3,1545 2681.02,1545 v2(2611.16,1475.14) ; R15.2 2594.76,1491.54 v2(2611.16,1475.14) ; D20.1 2627.56,1458.74 v2(2611.16,1475.14)
  Bottom Layer w20: v2(1936.3,1750) 1936.3,1565 2026.16,1475.14 v2(2611.16,1475.14)
NetD23_2: D23.2 R28.2 | length 86.6
  Top Layer w20: D23.2 2599.76,1331.06 R28.2
NetD24_2: D24.2 R29.2 | length 100.5
  Top Layer w20: D24.2 R29.2
NetD25_2: D25.2 R36.2 | length 87
  Top Layer w20: D25.2 R36.2
NetP2_2: P2.2 R13.1 U3.2 | length 342.3
  Top Layer w20: R13.1 P2.2 2331.3,1435 2301.3,1465 2301.3,1560 2310.49,1569.19 U3.2
NetP6_2: P6.2 R26.1 U3.6 | length 369.9
  Top Layer w20: U3.6 2240.49,1619.19 2286.3,1665 2286.3,1700 2321.3,1735 P6.2 2296.3,1805 R26.1
NetQ1_1: Q1.1 R31.2 R33.2 | length 145.6
  Top Layer w20: Q1.1 2289.96,2400.2 R33.2 R31.2
NetR1_1: R1.1 U1.1 | length 158.9
  Top Layer w20: R1.1 1567.83,1533.46 1601.3,1500 U1.1
NetR2_1: R2.1 R12.2 U2.3 | length 197.1
  Top Layer w20: R2.1 R12.2 1157.83,1373.46 1166.3,1365 U2.3
NetR4_2: R4.2 R5.1 | length 77.7
  Top Layer w20: R4.2 R5.1
NetR5_2: R5.2 R6.1 | length 77.7
  Top Layer w20: R5.2 R6.1
NetR7_2: R7.2 U1.3 | length 75.6
  Top Layer w20: U1.3 1974.76,1345 R7.2
NetR8_2: R8.2 R9.1 | length 77.7
  Top Layer w20: R8.2 R9.1
NetR9_2: R9.2 R10.1 | length 77.7
  Top Layer w20: R9.2 R10.1
NetR14_1: R14.1 R17.2 R18.2 U3.3 | length 419.1
  Top Layer w20: R14.1 2261.3,1476.54 2261.3,1575 2305.49,1619.19 U3.3 2470.49,1619.19 R17.2 R18.2
NetR19_2: R19.2 R20.1 | length 80.2
  Top Layer w50: R20.1 R19.2
NetR21_2: R21.2 R22.1 | length 72.8
  Top Layer w20: R21.2 R22.1
NetR22_2: R22.2 U4.6 | length 187.1
  Top Layer w20: R22.2 1611.3,2035 U4.6
NetR23_2: R23.2 U4.1 | length 96.5
  Top Layer w20: R23.2 U4.1
NetR27_1: R27.1 R30.2 R32.2 U3.5 | length 280.8
  Top Layer w20: R30.2 2086.3,1695 2096.3,1685 R32.2 2117.02,1669.19 U3.5 2214.76,1702.14 R27.1
NetR34_1: R34.1 R39.2 U6.5 | length 171
  Top Layer w20: R34.1 2391.3,546.54 U6.5 2420.28,493.46 R39.2
NetU1_2: U1.2 U2.1 | length 573.7
  Top Layer w20: v1(1221.3,1530) 1221.3,1470.51 U2.1
  Bottom Layer w20: v1(1221.3,1530) 1221.3,1445 1321.3,1345 U1.2
NetU6_3: U6.3 U6.7 | length 209.7
  Top Layer w20: U6.7 2291.3,390 2341.3,340 U6.3
RELAY_CTRL: P5.2 R31.1 | length 890.9
  Top Layer w20: R31.1 2517.83,2468.46 2666.3,2320 2666.3,2135 2749.45,2051.85 P5.2
TRAFO_TEMP: D21.2 D24.1 R32.1 U3.7 | length 250.9
  Top Layer w20: D21.2 1938.03,1580.47 D24.1 2120.83,1580.47 2132.11,1569.19 U3.7
TRAFO_VOLT: D22.2 D25.1 U6.1 U6.2 | length 277.6
  Top Layer w20: D22.2 2181.3,245 2211.81,275.51 U6.1 U6.2
TRIAC_CTRL: P5.1 R23.1 | length 1119.8
  Top Layer w20: R23.1 1977.83,1866.54 2056.3,1945 2541.3,1945 2631.3,1855 P5.1
TRIAC_TEMP: D20.2 D23.1 R18.1 U3.1 | length 309.5
  Top Layer w20: U3.1 2412.11,1519.19 2439.76,1491.54 R18.1 2471.3,1460 2511.3,1420 D20.2 2536.77,1418.27 D23.1
ZEROCROSS: P4.2 R7.1 R11.2 | length 1308.7
  Top Layer w20: R7.1 1976.3,1216.54 R11.2 2336.3,1215 2401.3,1150 2701.3,1150 2756.3,1205 2756.3,1380 2829.45,1453.15 P4.2
pads on no net: U2.7 U4.3 U4.5

## Polygon pours and split planes (outlines as drawn)
GND on Top Layer "Bottom Layer-No Net" (hatched 45Degree grid 20 track 8, remove dead copper, pour order 0): 1823.82,2950.93 1823.82,1853.17 1743.82,1773.17 1743.82,3.17 1738.82,-1.83 3143.82,-1.83 3143.82,2948.17 3141.07,2950.93

## Keep-outs
Keep-Out Layer:
  the board outline again, w10

## Dimensions
-196.85,2952.76 to 3149.61,2952.76 on Mechanical 1
3149.61,0 to 3149.61,2952.76 on Mechanical 1

## Text inside footprints (layer, text, board x,y; h text height)
C5: Top Overlay "+" at 1180.28,824.53 h40 r180
C6: Top Overlay "+" at 1081.22,319.53 h40 r180
C9: Top Overlay "+" at 2211.77,871.5 h40 r270